# Altium PCB HC-NBIOT_Single_lamp_controller-V1.2.PcbDoc (part 2 of 2)
Units mm, origin at the board's own origin, x right, y up, seen from the top; angles counter-clockwise.
Board outline 119.9 x 57.5 mm, 2 copper layers (Top Layer, Bottom Layer); 151 components, 104 nets, 484 pads, 495 vias.
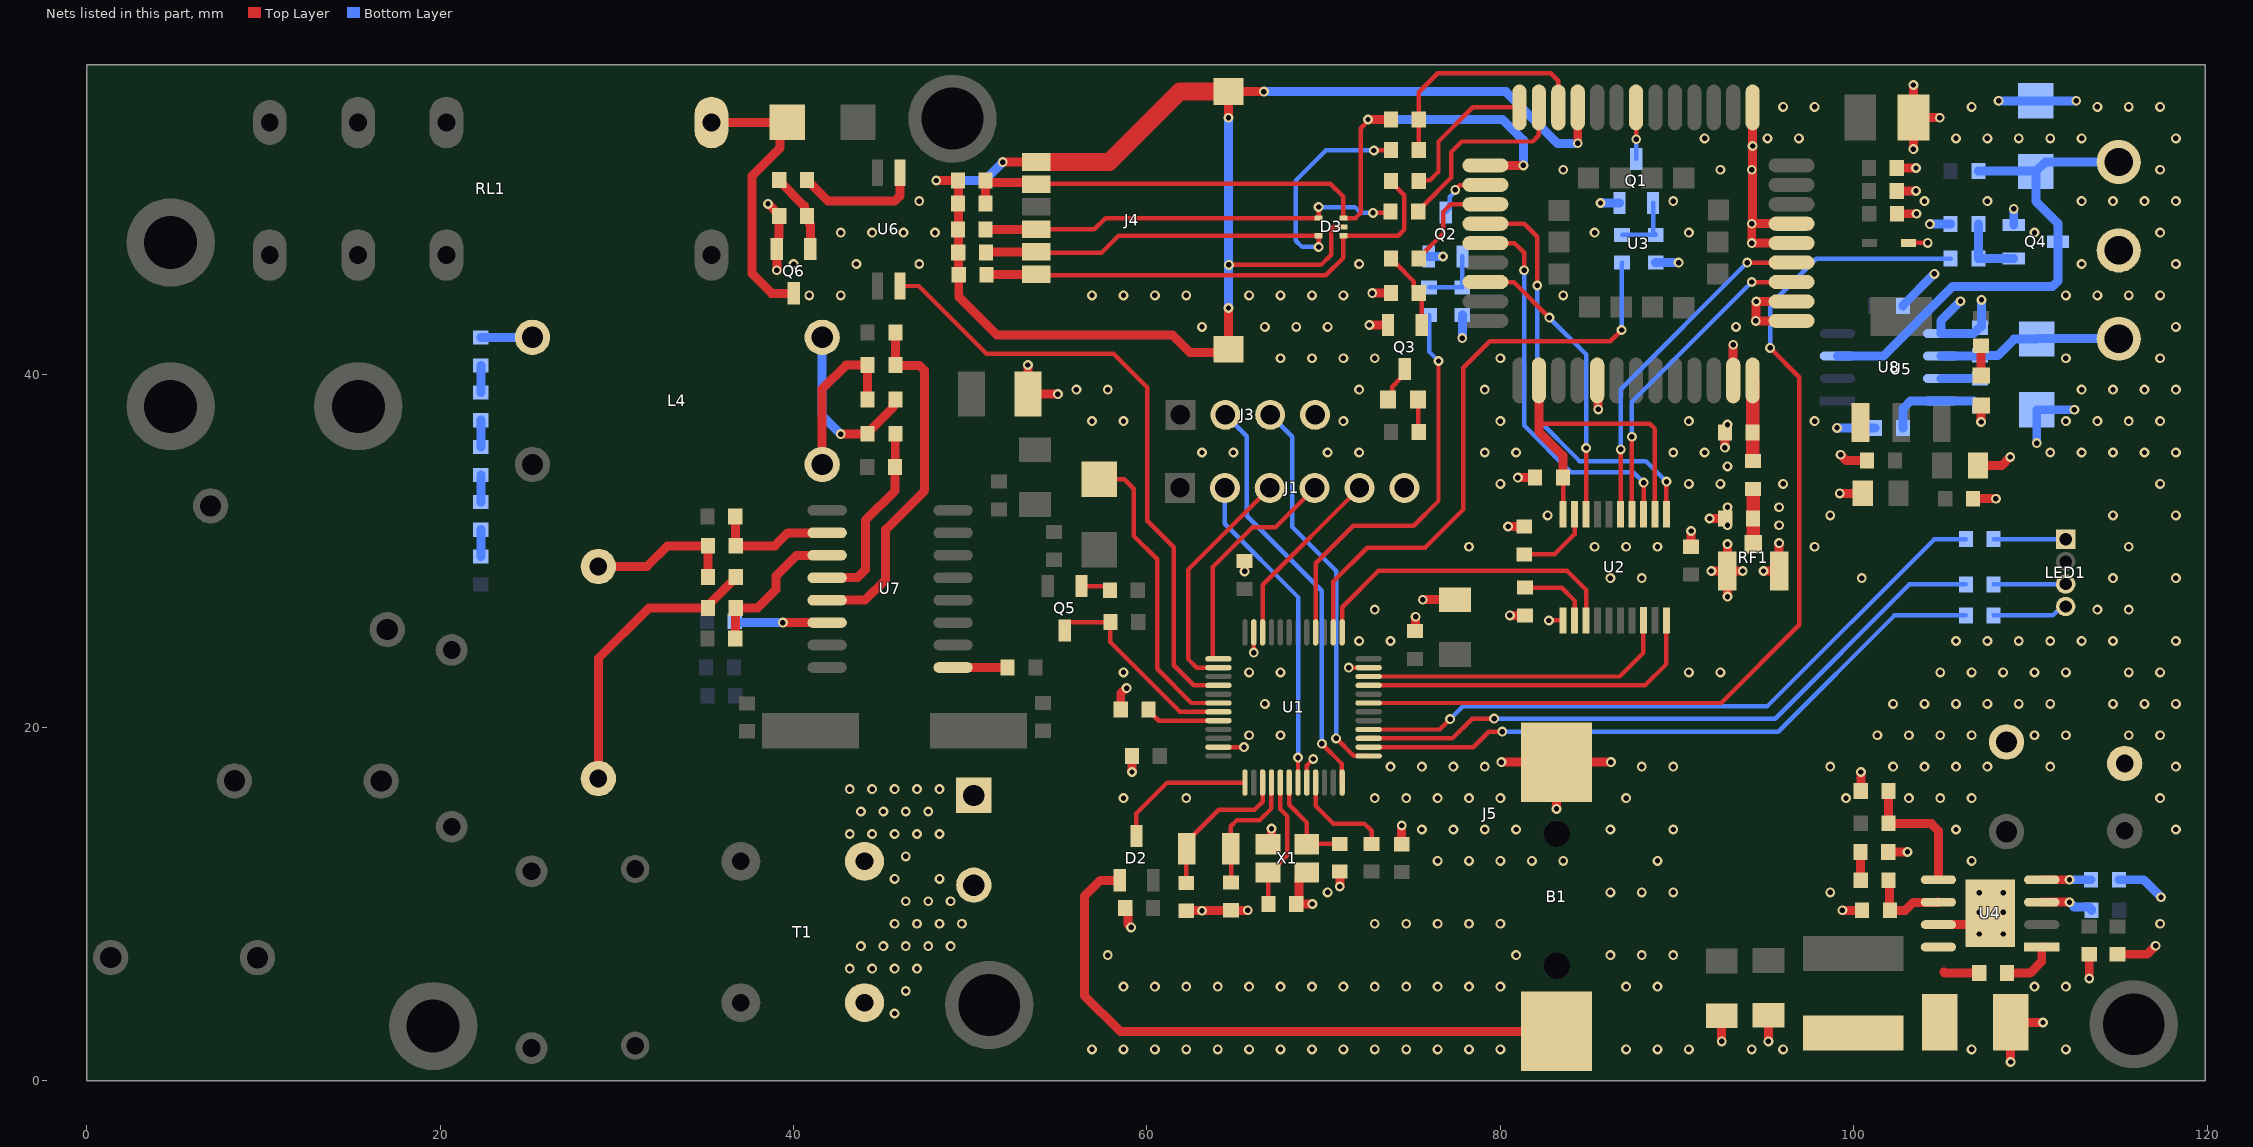
[diagram p2: the nets of this part, all layers, seen from the top]

## Via types
v1: diameter 0.559, hole 0.305, Top Layer to Bottom Layer, tented both sides, 493 vias
v2: diameter 1.8, hole 1.2, Top Layer to Bottom Layer, 2 vias

## Nets (pads, with @x,y where several pads share a name; then routed paths per layer and width w, separated by ;. In a path a pad name is that pad's centre, name@x,y a point inside that pad or via, vN(x,y) a via of type N, cw(c..) or ccw(c..) an arc to the next point about the centre after c; other vN are vias at no path point) (continued)
GND: B1.2 C1.2 C2.2 C3.2 C4.2 C5.2 C6.2 C7.1 C8.1 C9.2 C10.2 C11.2 C12.2 C13.1 C14.1 C15.1 C16.1 C17.1 C18.1 C28.2 C29.2 C30.1 C31.1 C32.1 C33.1 C34.1 C35.1 C36.2 C37.1 C38.1 C49.1 C50.1 C51.1 D1.2 D5.1 DW1.A DW3.A DW5.A J1.6 J3.4 J5.4 J11.1 Q1.2 Q2.2 Q3.2 Q4.2 Q6.2 R4.1 R5.1 R6.1 R22.1 R23.1 R24.1 R25.1 R27.1 R28.2 R34.1 R49.1 RF1.2 RF1.3 U1.8 U1.23 U1.35 U1.47 U2.11 U3.1 U3.27 U3.34 U3.36 U3.37 U3.40 U3.41 U4.7 U4.9 U5.1 U8.5 X1.2 X1.4 | length 137.7
  Top Layer w0.254: U1.47@64.051,18.883 v1(65.496,18.883) ; v1(66.051,24.232) U1.35@66.051,25.383 ; U1.8@69.051,16.883 69.059,16.892 69.059,17.853 v1(69.418,18.212) ; v1(71.425,23.383) U1.23@72.551,23.383 ; v1(82.753,26.053) U2.11@83.555,26.053 ; D1.2@103.103,47.422 v1(104.196,47.422)
  Top Layer w0.508: v1(38.557,49.632) 39.192,48.996 R49.1@39.192,48.946 39.192,47.734 39.151,47.693 39.151,47.167 Q6.2@39.055,47.071 v1(39.055,45.872) ; v1(53.264,40.513) R28.2@53.264,38.862 v1(54.966,38.862) ; R6.1@58.522,21.006 58.522,21.927 58.819,22.225 v1(58.852,22.225) ; C18.1@58.776,9.779 58.922,9.633 58.922,8.871 v1(59.106,8.687) ; v1(59.157,17.475) C15.1@59.157,18.39 ; v1(63.119,9.627) C11.2@62.23,9.627 62.243,9.639 64.757,9.639 C12.2@64.77,9.652 v1(65.71,9.652) ; v1(65.532,28.829) C14.1@65.532,29.413 ; X1.4@66.853,13.386 67.056,13.589 v1(67.056,14.275) ; X1.2@69.053,11.786 68.928,11.786 68.607,11.465 68.607,11.169 68.605,11.167 68.605,10.501 68.599,10.495 68.599,10.154 C7.1@68.453,10.008 v1(69.367,10.008) ; v1(70.917,10.998) C8.1@70.917,11.836 ; v1(72.593,42.779) Q3.2@73.65,42.779 ; v1(72.756,44.577) R24.1@73.812,44.577 ; C17.1@74.422,13.386 v1(74.422,14.453) ; C16.1@75.184,25.451 75.209,25.476 v1(75.209,26.264) ; v1(75.615,27.229) C13.1@77.445,27.229 ; v1(80.061,18.034) B1.2@83.185,18.034 ; v1(80.442,31.369) R4.1@81.356,31.369 ; v1(80.543,26.34) R5.1@81.407,26.34 ; v1(81.001,34.138) C2.2@81.966,34.138 ; v1(83.185,15.392) B1.2@83.185,18.034 ; U3.27@85.486,39.644 85.541,39.588 85.541,38.004 v1(85.547,37.998) ; v1(86.258,18.034) B1.2@83.185,18.034 ; C1.2@90.805,30.226 v1(90.805,31.115) ; v1(91.846,31.826) C10.2@92.735,31.826 ; v1(91.946,28.854) RF1.2@92.835,28.854 ; v1(92.532,2.235) C29.2@92.532,3.682 ; v1(92.71,35.839) C9.2@92.71,36.703 ; v1(92.862,27.407) RF1.2@92.862,28.881 ; v1(92.862,30.378) RF1.2@92.862,28.881 ; U3.34@93.186,39.644 v1(93.186,41.656) ; v1(93.724,28.854) RF1.2@92.835,28.854 ; U3.1@94.286,55.094 v1(94.286,52.908) 94.286,48.575 94.234,48.523 v1(94.234,48.51) ; v1(94.896,28.854) RF1.3@95.785,28.854 95.783,28.856 v1(95.783,30.429) ; v1(95.174,2.235) C28.2@95.174,3.708 ; U3.36@96.488,43.01 v1(94.463,43.01) 94.463,44.07 94.488,44.096 v1(94.488,44.11) U3.37@96.488,44.11 ; U3.40@96.488,47.41 v1(94.234,47.41) v1(94.234,48.51) ; U3.41@96.488,48.51 v1(94.234,48.51) ; v1(99.212,33.249) C34.1@100.508,33.249 ; v1(99.263,35.433) 99.593,35.103 C35.1@100.762,35.103 ; v1(99.365,9.652) C37.1@100.482,9.652 ; R27.1@100.406,16.408 v1(100.406,17.475) ; C38.1@101.956,12.954 v1(103.048,12.954) ; C4.2@102.437,50.368 v1(103.53,50.368) ; C5.2@102.437,51.664 v1(103.53,51.664) ; C3.2@102.462,49.073 v1(103.556,49.073) ; v1(103.381,52.73) C6.2@103.381,54.508 ; v1(103.381,56.363) C6.2@103.381,54.508 ; U4.7@104.796,8.839 107.086,8.839 U4.9@107.721,9.474 ; v1(104.877,54.508) C6.2@103.381,54.508 ; C33.1@106.756,32.944 v1(108.052,32.944) ; C32.1@107.036,34.823 108.382,34.823 v1(108.864,35.306) ; v1(107.213,37.287) D5.1@107.213,38.229 ; v1(108.883,1.067) DW1.A@108.883,3.302 v1(110.719,3.302) ; v1(113.335,5.791) C31.1@113.335,7.163 ; C30.1@114.935,7.163 116.611,7.163 v1(117.094,7.645) ; RF1.2@92.835,28.854 RF1.2@92.862,28.881
  Bottom Layer w0.508: Q2.2@75.961,46.655 v1(76.759,46.655) ; v1(77.851,42.037) R23.1@77.851,43.332 ; v1(85.674,49.682) Q1.2@86.746,49.682 ; R22.1@88.798,46.304 v1(90.094,46.304) ; v1(99.06,36.957) C49.1@101.219,36.957 ; C51.1@102.794,43.84 102.794,43.89 v1(104.572,45.668) ; v1(104.318,48.489) R34.1@105.486,48.489 ; v1(106.045,44.12) 104.935,43.009 104.935,42.294 U8.5@104.931,42.291 106.782,42.291 107.113,42.621 C50.1@107.163,42.621 107.239,42.697 v1(107.239,44.196) ; v1(108.204,55.467) DW3.A@110.312,55.467 v1(112.598,55.467) ; Q4.2@109.063,48.438 v1(109.063,49.352) ; v1(110.363,36.093) DW5.A@110.363,37.98 v1(112.497,37.98) ; R25.1@115.011,11.379 116.408,11.379 v1(117.399,10.389)
  other v1: 56.896,1.778 58.674,1.778 60.452,1.778 62.23,1.778 64.008,1.778 65.786,1.778 67.564,1.778 69.342,1.778 71.12,1.778 72.898,1.778 74.676,1.778 76.454,1.778 78.232,1.778 80.01,1.778 87.122,1.778 88.9,1.778 90.678,1.778 94.234,1.778 96.012,1.778 106.68,1.778 112.014,1.778 58.674,5.334 60.452,5.334 62.23,5.334 64.008,5.334 65.786,5.334 67.564,5.334 69.342,5.334 71.12,5.334 72.898,5.334 74.676,5.334 76.454,5.334 78.232,5.334 80.01,5.334 87.122,5.334 88.9,5.334 110.236,5.334 112.014,5.334 57.785,7.112 80.899,7.112 86.233,7.112 88.011,7.112 89.789,7.112 107.112,8.306 108.458,8.306 72.898,8.89 74.676,8.89 76.454,8.89 78.232,8.89 80.01,8.89 117.348,8.89 107.112,9.55 108.458,9.55 107.112,10.643 108.458,10.643 70.231,10.668 86.233,10.668 88.011,10.668 89.789,10.668 98.679,10.668 76.454,12.446 78.232,12.446 80.01,12.446 81.788,12.446 83.566,12.446 88.9,12.446 106.68,12.446 75.565,14.224 77.343,14.224 79.121,14.224 80.899,14.224 86.233,14.224 89.789,14.224 105.791,14.224 118.237,14.224 58.674,16.002 62.23,16.002 72.898,16.002 74.676,16.002 76.454,16.002 78.232,16.002 80.01,16.002 87.122,16.002 99.568,16.002 103.124,16.002 104.902,16.002 106.68,16.002 117.348,16.002 73.787,17.78 75.565,17.78 77.343,17.78 79.121,17.78 88.011,17.78 89.789,17.78 98.679,17.78 102.235,17.78 104.013,17.78 105.791,17.78 107.569,17.78 111.125,17.78 118.237,17.78 65.786,19.558 67.564,19.558 101.346,19.558 103.124,19.558 104.902,19.558 106.68,19.558 110.236,19.558 112.014,19.558 115.57,19.558 117.348,19.558 66.675,21.336 102.235,21.336 104.013,21.336 105.791,21.336 107.569,21.336 109.347,21.336 111.125,21.336 114.681,21.336 116.459,21.336 118.237,21.336 58.674,23.114 65.786,23.114 67.564,23.114 90.678,23.114 92.456,23.114 104.902,23.114 106.68,23.114 108.458,23.114 110.236,23.114 112.014,23.114 115.57,23.114 117.348,23.114 72.009,24.892 73.787,24.892 105.791,24.892 107.569,24.892 109.347,24.892 111.125,24.892 112.903,24.892 114.681,24.892 118.237,24.892 72.898,26.67 113.792,26.67 115.57,26.67 86.233,28.448 88.011,28.448 100.457,28.448 114.681,28.448 118.237,28.448 78.232,30.226 85.344,30.226 87.122,30.226 88.9,30.226 97.79,30.226 115.57,30.226 92.862,31.445 95.783,31.445 82.677,32.004 98.679,32.004 114.681,32.004 118.237,32.004 92.862,32.461 95.783,32.461 80.01,33.782 90.678,33.782 92.456,33.782 96.012,33.782 117.348,33.782 92.862,34.773 63.119,35.56 64.897,35.56 70.231,35.56 72.009,35.56 79.121,35.56 80.899,35.56 89.789,35.56 91.567,35.56 111.125,35.56 112.903,35.56 114.681,35.56 116.459,35.56 118.237,35.56 92.862,37.135 56.896,37.338 58.674,37.338 71.12,37.338 80.01,37.338 90.678,37.338 97.79,37.338 112.014,37.338 113.792,37.338 115.57,37.338 117.348,37.338 56.007,39.116 57.785,39.116 72.009,39.116 79.121,39.116 112.903,39.116 114.681,39.116 116.459,39.116 118.237,39.116 67.564,40.894 69.342,40.894 71.12,40.894 72.898,40.894 80.01,40.894 112.014,40.894 117.348,40.894 63.119,42.672 66.675,42.672 68.453,42.672 70.231,42.672 93.345,42.672 118.237,42.672 40.894,44.45 42.672,44.45 56.896,44.45 58.674,44.45 60.452,44.45 62.23,44.45 65.786,44.45 67.564,44.45 69.342,44.45 71.12,44.45 83.566,44.45 112.014,44.45 113.792,44.45 115.57,44.45 117.348,44.45 40.005,46.228 43.561,46.228 47.117,46.228 72.009,46.228 112.903,46.228 118.237,46.228 42.672,48.006 44.45,48.006 46.228,48.006 48.006,48.006 85.344,48.006 90.678,48.006 110.236,48.006 117.348,48.006 47.117,49.784 89.789,49.784 104.013,49.784 107.569,49.784 112.903,49.784 114.681,49.784 116.459,49.784 118.237,49.784 83.566,51.562 92.456,51.562 94.234,51.562 117.348,51.562 91.567,53.34 95.123,53.34 96.901,53.34 105.791,53.34 107.569,53.34 109.347,53.34 111.125,53.34 112.903,53.34 118.237,53.34 96.012,55.118 97.79,55.118 106.68,55.118 113.792,55.118 115.57,55.118 117.348,55.118
IBN: C40.2 R35.1 U7.3 | length 8.6
  Top Layer w0.508: C40.2@36.703,25.044 36.716,25.057 36.716,26.736 R35.1@36.728,26.748 37.95,26.748 39.014,27.813 39.014,28.575 40.183,29.743 U7.3@41.901,29.743
IBP: C39.2 R30.1 U7.2 | length 7.1
  Top Layer w0.508: C39.2@36.703,31.933 36.716,31.921 36.716,30.294 R30.1@36.728,30.282 38.943,30.282 39.675,31.013 U7.2@41.901,31.013
LED_B: R3.2 U1.14 | length 36.9
  Top Layer w0.254: U1.14@72.551,18.883 78.471,18.883 79.35,19.761 v1(80.112,19.761)
  Bottom Layer w0.254: v1(80.112,19.761) 95.733,19.761 102.311,26.34 R3.2@106.35,26.34
LED_DRV1: C50.2 DW5.K J12.1 U8.6 | length 10.5
  Bottom Layer w0.508: U8.6@104.931,41.021 104.935,41.025 107.141,41.025 C50.2@107.163,41.046 108.153,41.046 109.086,41.98 DW5.K@110.363,41.98 110.383,42 J12.1@115,42
LED_G: R2.2 U1.15 | length 37.4
  Top Layer w0.254: U1.15@72.551,19.383 77.295,19.383 78.41,20.498 v1(79.654,20.498)
  Bottom Layer w0.254: v1(79.654,20.498) 95.555,20.498 103.149,28.092 R2.2@106.35,28.092
LED_R: R1.2 U1.16 | length 38.3
  Top Layer w0.254: U1.16@72.551,19.883 76.576,19.883 v1(77.165,20.472)
  Bottom Layer w0.254: v1(77.165,20.472) 77.902,21.209 95.123,21.209 104.572,30.658 R1.2@106.35,30.658
NB-PWR: R16.1 U1.26 | length 33.6
  Top Layer w0.254: U1.26@70.551,25.383 70.551,28.26 72.466,30.175 75.743,30.175 77.902,32.334 77.902,40.361 79.4,41.859 86.233,41.859 v1(86.868,42.494)
  Bottom Layer w0.254: v1(86.868,42.494) 86.868,46.279 R16.1@86.893,46.304
NB-RI: U1.25 U2.13 | length 18.3
  Top Layer w0.254: U1.25@71.051,25.383 71.051,26.804 73.101,28.854 83.795,28.854 84.855,27.794 U2.13@84.855,26.053
NB-RST: R17.1 U1.28 | length 23.1
  Top Layer w0.254: U1.28@69.551,25.383 69.551,29.292 71.679,31.42 75.108,31.42 76.505,32.817 v1(76.505,40.742)
  Bottom Layer w0.254: R17.1@75.971,43.332 75.971,41.275 v1(76.505,40.742)
NetC9_1: C9.1 R7.2 U3.35 | length 4.6
  Top Layer w0.762: U3.35@94.286,39.644 C9.1@94.285,36.703 94.285,35.096 94.304,35.077 R7.2@94.31,35.077
NetC10_1: C10.1 R7.1 RF1.1 | length 3.1
  Top Layer w0.762: RF1.1@94.31,30.379 C10.1@94.31,31.826 R7.1@94.31,33.503
NetC23_2: C23.2 D3.4 J4.3 R8.2 | length 24
  Top Layer w0.254: J4.3@53.737,48.188 57.028,48.188 57.667,48.828 D3.4@69.723,48.828 v1(69.723,49.454) ; v1(72.796,49.124) 73.711,49.124 R8.2@73.787,49.2
  Top Layer w0.508: C23.2@50.876,48.184 50.881,48.188 53.737,48.188 J4.3@53.742,48.193
  Bottom Layer w0.254: v1(69.723,49.454) 71.774,49.454 72.104,49.124 v1(72.796,49.124)
NetC24_2: C24.2 D3.5 J4.6 R10.2 | length 30.9
  Top Layer w0.254: J4.6@53.725,46.906 53.767,46.863 57.429,46.863 58.395,47.828 D3.5@69.723,47.828 v1(69.723,47.193) ; v1(72.847,52.654) 73.787,52.654 R10.2@73.812,52.68
  Top Layer w0.508: C24.2@50.902,46.888 50.919,46.906 53.725,46.906 J4.6@53.742,46.923
  Bottom Layer w0.254: v1(69.723,47.193) 68.783,47.193 68.428,47.549 68.428,50.952 70.129,52.654 v1(72.847,52.654)
NetC25_2: C25.2 D3.1 J4.5 R11.2 | length 28.6
  Top Layer w0.254: J4.5@53.725,45.636 53.767,45.593 70.129,45.593 71.123,46.587 D3.1@71.123,47.828 74.219,47.828 74.574,48.184 74.574,50.115 73.812,50.877 R11.2@73.812,50.927
  Top Layer w0.508: C25.2@50.927,45.618 50.944,45.636 53.725,45.636 J4.5@53.742,45.653
NetC27_1: C27.1 U4.1 | length 3
  Top Layer w0.508: C27.1@108.687,6.096 109.982,6.096 110.646,6.76 U4.1@110.646,7.569
NetC27_2: C27.2 DW1.K L2.1 U4.8 | length 2
  Top Layer w0.508: 105.105,6.147 105.156,6.096 C27.2@107.112,6.096
NetC37_2: C37.2 R26.2 U4.6 | length 4.7
  Top Layer w0.508: R26.2@101.981,11.354 102.019,11.316 102.019,9.69 C37.2@102.057,9.652 102.921,9.652 103.374,10.105 104.792,10.105 U4.6@104.796,10.109
NetC38_2: C38.2 R26.1 | length 1.6
  Top Layer w0.508: C38.2@100.381,12.954 100.393,12.941 100.393,11.367 R26.1@100.406,11.354
NetC44_2: C44.2 U7.6 | length 5.3
  Top Layer w0.508: v1(39.395,25.933) U7.6@41.901,25.933
  Bottom Layer w0.508: C44.2@36.678,26.01 36.744,25.943 39.386,25.943 v1(39.395,25.933)
NetC49_2: C49.2 R50.2 U8.8 | length 5.8
  Bottom Layer w0.508: C49.2@102.794,36.957 102.794,38.049 103.226,38.481 U8.8@104.931,38.481 106.808,38.481 107.113,38.176 R50.2@107.163,38.176
NetD2_3: D2.3 U1.1 | length 8.2
  Top Layer w0.254: D2.3@59.411,13.848 59.411,15.138 61.155,16.883 U1.1@65.551,16.883
NetD4_1: D4.1 Q3.3 | length 2.1
  Top Layer w0.254: D4.1@73.65,38.557 73.885,38.792 73.885,39.289 74.377,39.781 74.6,40.004 Q3.3@74.6,40.279
NetD4_2: D4.2 R15.1 | length 1.8
  Top Layer w0.254: D4.2@75.35,38.557 75.35,36.766 R15.1@75.387,36.728
NetD5_2: D5.2 R20.2 | length 1.7
  Top Layer w0.508: D5.2@107.213,39.929 R20.2@107.213,41.605
NetDW4_A: DW4.A Q6.3 RL1.1 | length 16.5
  Top Layer w0.508: RL1.1@35.357,54.236 DW4.A@39.631,54.236 ; DW4.A@39.649,54.254 DW4.A@39.631,54.236 ; Q6.3@40.005,44.572 38.765,44.572 37.643,45.695 37.643,51.206 39.226,52.79 39.226,53.831 DW4.A@39.631,54.236
NetJ5_1: J5.1 T1.3
  other v1: 45.72,11.43 46.355,12.7 43.18,13.97 44.45,13.97 45.72,13.97 46.99,13.97 48.26,13.97 43.815,15.24 45.085,15.24 46.355,15.24 47.625,15.24 43.18,16.51 44.45,16.51 45.72,16.51 46.99,16.51 48.26,16.51
NetJ5_2: J5.2 T1.2
  other v1: 45.72,3.81 46.355,5.08 43.18,6.35 44.45,6.35 45.72,6.35 46.99,6.35 43.815,7.62 45.085,7.62 46.355,7.62 47.625,7.62 48.895,7.62 45.72,8.89 46.99,8.89 48.26,8.89 49.53,8.89 46.355,10.16 47.625,10.16 48.895,10.16 48.26,11.43
NetL1_1: L1.1 U1.9 | length 5.8
  Top Layer w0.254: U1.9@69.551,16.883 69.545,16.877 69.545,15.57 70.561,14.554 72.314,14.554 72.72,14.148 L1.1@72.72,13.411
NetL3_1: L3.1 R30.2 R32.2 | length 8.5
  Top Layer w0.508: L3.1@28.956,29.108 31.699,29.108 32.873,30.282 R30.2@35.154,30.282 R32.2@35.154,28.515
NetL3_2: L3.2 R32.1 R35.2 | length 16.6
  Top Layer w0.508: L3.2@28.956,17.109 28.956,23.901 31.826,26.772 R35.2@35.13,26.772 ; R35.2@35.154,26.748 R35.2@35.13,26.772 ; R32.1@36.728,28.515 36.728,28.465 35.3,27.036 35.3,26.941 R35.2@35.13,26.772
NetL4_2: L4.2 R42.1 | length 2.9
  Bottom Layer w0.508: R42.1@22.301,42.062 22.31,42.071 25.218,42.071 L4.2@25.227,42.08
NetL4_3: L4.3 R45.1 R47.2 | length 10
  Top Layer w0.508: v1(42.672,36.601) 42.682,36.611 44.184,36.611 R47.2@44.196,36.623 44.196,36.673 45.625,38.102 45.625,38.422 R45.1@45.771,38.568
  Bottom Layer w0.508: L4.3@41.626,42.08 41.626,37.648 v1(42.672,36.601)
NetL4_4: L4.4 R43.2 R45.2 | length 9.4
  Top Layer w0.508: L4.4@41.626,34.882 41.626,39.162 42.976,40.512 R43.2@44.196,40.512 R45.2@44.196,38.568
NETLED: R18.1 U3.16 | length 5.8
  Top Layer w0.254: R18.1@75.387,46.533 75.387,46.583 76.784,47.98 76.784,49.2 77.194,49.61 U3.16@79.161,49.61
NetLED1_1: LED1.1 R1.1 | length 4.1
  Bottom Layer w0.254: R1.1@107.925,30.658 111.997,30.658 LED1.1@112,30.655
NetLED1_3: LED1.3 R2.1 | length 4.1
  Bottom Layer w0.254: R2.1@107.925,28.092 107.947,28.115 LED1.3@112,28.115
NetLED1_4: LED1.4 R3.1 | length 4.3
  Bottom Layer w0.254: R3.1@107.925,26.34 111.266,26.34 111.771,26.845 LED1.4@112,26.845
NetQ1_1: Q1.1 R16.2 R22.2 | length 3.8
  Bottom Layer w0.254: R16.2@86.893,47.879 R22.2@88.798,47.879 88.646,48.031 Q1.1@88.646,49.682
NetQ2_1: Q2.1 R17.2 R23.2 | length 3.6
  Bottom Layer w0.254: R17.2@75.971,44.907 R23.2@77.851,44.907 77.861,44.917 Q2.1@77.861,46.655
NetQ3_1: Q3.1 R18.2 R24.2 | length 4.5
  Top Layer w0.254: R18.2@73.812,46.533 73.812,46.483 74.085,46.21 74.135,46.21 75.114,45.231 75.114,44.85 75.55,44.414 Q3.1@75.55,42.779
NetQ4_1: Q4.1 R33.1 R34.2 | length 4
  Bottom Layer w0.508: R34.2@107.061,48.489 R33.1@107.061,46.533 107.064,46.535 109.06,46.535 Q4.1@109.063,46.538
NetQ5_1: Q5.1 R36.2 | length 1.7
  Top Layer w0.254: Q5.1@56.297,27.996 57.678,27.996 R36.2@57.912,27.762
NetQ6_1: Q6.1 R48.2 R49.2 | length 4.6
  Top Layer w0.508: R48.2@39.192,50.978 39.192,50.928 40.621,49.499 40.621,49.092 R49.2@40.767,48.946 40.913,48.8 40.913,48.494 40.955,48.452 Q6.1@40.955,47.071
NetR4_2: R4.2 U2.9 | length 4.4
  Top Layer w0.254: R4.2@81.356,29.794 83.073,29.794 84.206,30.927 U2.9@84.206,32.055
NetR5_2: R5.2 U2.12 | length 4.2
  Top Layer w0.254: R5.2@81.407,27.915 83.471,27.915 84.205,27.181 U2.12@84.205,26.053
NetR6_2: R6.2 U1.44 | length 4.2
  Top Layer w0.254: R6.2@60.096,21.006 60.096,20.956 60.669,20.383 U1.44@64.051,20.383
NetR19_1: R19.1 U4.3 | length 3
  Top Layer w0.508: U4.3@110.646,10.109 v1(112.217,10.109)
  Bottom Layer w0.508: v1(112.217,10.109) 112.478,9.848 113.316,9.848 113.462,9.702 R19.1@113.462,9.652
NetR21_1: R21.1 R27.2 U4.5 | length 7.6
  Top Layer w0.508: R27.2@101.981,16.408 R21.1@101.981,14.58 102.006,14.554 104.394,14.554 104.796,14.152 U4.5@104.796,11.379
NetR25_2: R25.2 U4.4 | length 2.8
  Top Layer w0.508: U4.4@110.646,11.379 v1(112.217,11.379)
  Bottom Layer w0.508: v1(112.217,11.379) R25.2@113.436,11.379
NetR38_1: R38.1 R39.2 | length 1.5
  Bottom Layer w0.508: R38.1@22.301,29.667 R39.2@22.301,31.191
NetR39_1: R39.1 R40.2 | length 1.5
  Bottom Layer w0.508: R39.1@22.301,32.766 R40.2@22.301,34.29
NetR40_1: R40.1 R41.2 | length 1.5
  Bottom Layer w0.508: R40.1@22.301,35.865 R41.2@22.301,37.389
NetR41_1: R41.1 R42.2 | length 1.5
  Bottom Layer w0.508: R41.1@22.301,38.964 R42.2@22.301,40.488
NetR44_1: R44.1 U7.9 | length 3.1
  Top Layer w0.508: U7.9@49.031,23.393 R44.1@52.121,23.393
NetR50_1: R50.1 U8.7 | length 2.2
  Bottom Layer w0.508: U8.7@104.931,39.751 R50.1@107.163,39.751
nRST: J1.2 U1.7 | length 18.4
  Top Layer w0.254: U1.7@68.551,16.883 68.553,16.885 68.553,18.286 v1(68.555,18.288)
  Bottom Layer w0.254: J1.2@64.414,33.553 64.414,31.521 68.555,27.381 v1(68.555,18.288)
PWM: R33.2 U1.19 | length 56.3
  Top Layer w0.254: U1.19@72.551,21.383 92.503,21.383 96.926,25.806 96.926,39.827 v1(95.275,41.478)
  Bottom Layer w0.254: v1(95.275,41.478) 95.275,43.917 97.892,46.533 R33.2@105.486,46.533
PWM1_OUT: DW3.K J10.1 Q4.3 R31.1 U8.3 | length 29.1
  Bottom Layer w0.508: U8.3@99.081,41.021 101.676,41.021 105.613,44.958 111.264,44.958 111.562,45.256 Q4.3@111.562,47.488 111.562,48.534 110.312,49.784 DW3.K@110.312,51.467 ; R31.1@107.061,51.486 110.293,51.486 DW3.K@110.312,51.467 ; J10.1@115,52 110.845,52 DW3.K@110.312,51.467
PWRKEY: Q1.3 U3.7 | length 2.9
  Top Layer w0.254: U3.7@87.686,55.094 87.691,55.088 87.691,53.294 v1(87.696,53.289)
  Bottom Layer w0.254: Q1.3@87.696,52.182 v1(87.696,53.289)
RCC_OSC32_IN: C11.1 U1.3 X2.2 | length 8.7
  Top Layer w0.254: C11.1@62.23,11.201 62.23,13.112 X2.2@62.25,13.132 62.25,13.532 64.06,15.342 66.091,15.342 66.551,15.801 U1.3@66.551,16.883
RCC_OSC32_OUT: C12.1 U1.4 X2.1 | length 7.4
  Top Layer w0.254: C12.1@64.77,11.227 64.77,13.112 X2.1@64.75,13.132 64.75,14.407 65.1,14.757 66.396,14.757 67.051,15.412 U1.4@67.051,16.883
RCC_OSC_IN: C7.2 U1.5 X1.1 | length 7.6
  Top Layer w0.254: C7.2@66.878,10.008 66.878,11.76 X1.1@66.853,11.786 66.978,11.786 67.945,12.752 67.945,14.986 67.551,15.38 U1.5@67.551,16.883
RCC_OSC_OUT: C8.2 U1.6 X1.3 | length 5.8
  Top Layer w0.254: U1.6@68.051,16.883 68.051,15.617 69.053,14.615 X1.3@69.053,13.386 69.078,13.411 C8.2@70.917,13.411
REL: R48.1 U6.3 | length 7.2
  Top Layer w0.508: R48.1@40.767,50.978 40.767,50.928 40.913,50.782 40.963,50.782 41.961,49.784 45.727,49.784 46.025,50.082 U6.3@46.025,51.384
REL_EN: U1.40 U6.2 | length 35.7
  Top Layer w0.254: U6.2@46.025,44.984 47.091,44.984 50.927,41.148 58.115,41.148 60.02,39.243 60.02,31.699 61.519,30.201 61.519,23.52 62.656,22.383 U1.40@64.051,22.383
RESET: Q2.3 U3.15 | length 3.3
  Top Layer w0.254: v1(77.452,50.422) 77.452,50.436 77.695,50.679 79.13,50.679 U3.15@79.161,50.71
  Bottom Layer w0.254: Q2.3@76.911,49.154 77.134,49.377 77.134,50.022 77.452,50.34 v1(77.452,50.422)
RI: U2.8 U3.20 | length 16.5
  Top Layer w0.254: U3.20@79.161,45.21 80.762,45.21 v1(82.779,43.193) ; U2.8@84.856,32.055 84.912,32.111 84.861,32.162 v1(84.861,35.814)
  Bottom Layer w0.254: v1(82.779,43.193) 84.861,41.11 v1(84.861,35.814)
RXD: U2.1 U3.17 | length 24.2
  Top Layer w0.254: U3.17@79.161,48.51 81.361,48.51 82.093,47.777 v1(82.093,45.009) ; U2.1@89.405,32.055 89.408,32.058 v1(89.408,33.909)
  Bottom Layer w0.254: v1(82.093,45.009) 82.093,37.465 84.48,35.077 88.24,35.077 v1(89.408,33.909)
RXD_DBG: U2.4 U3.38 | length 18.2
  Top Layer w0.254: v1(87.452,36.449) 87.452,32.058 U2.4@87.455,32.055 ; v1(94.234,45.21) U3.38@96.488,45.21
  Bottom Layer w0.254: v1(87.452,36.449) 87.452,38.428 v1(94.234,45.21)
SIM_CLK: R11.1 U3.13 | length 8.4
  Top Layer w0.254: R11.1@75.387,50.927 75.435,50.975 76.019,50.975 76.505,51.46 76.505,53.162 78.436,55.094 U3.13@81.086,55.094
SIM_DATA: R9.2 R10.1 U3.11 | length 13.3
  Top Layer w0.254: R10.1@75.387,52.68 R9.2@75.387,54.407 75.387,55.956 76.454,57.023 82.855,57.023 83.286,56.592 U3.11@83.286,55.094
SIM_GND: C19.1 C22.1 C23.1 C24.1 C25.1 D3.2 J4.2 J4.7 J4.8 U3.10 | length 88.9
  Top Layer w0.254: v1(64.643,46.177) 69.85,46.177 70.434,46.761 70.434,48.18 70.583,48.328 D3.2@71.123,48.328
  Top Layer w0.508: v1(48.082,50.952) C19.1@49.301,50.952 49.327,50.927 C24.1@49.327,46.888 49.327,45.644 C25.1@49.352,45.618 49.352,44.374 51.511,42.215 61.443,42.215 62.433,41.224 64.454,41.224 J4.7@64.622,41.392 v1(64.622,43.739) ; v1(51.841,51.994) 51.846,51.998 53.737,51.998 J4.2@53.742,52.003 ; v1(64.622,54.508) J4.8@64.622,55.992 64.627,55.987 66.619,55.987 v1(66.624,55.982) ; v1(84.386,53.061) U3.10@84.386,55.094
  Top Layer w1.016: J4.2@53.742,52.003 57.871,52.003 61.859,55.992 J4.8@64.622,55.992
  Bottom Layer w0.508: v1(48.082,50.952) 50.8,50.952 v1(51.841,51.994) ; v1(64.622,43.739) v1(64.622,54.508) ; v1(66.624,55.982) 80.315,55.982 83.236,53.061 v1(84.386,53.061)
SIM_RST: R8.1 U3.12 | length 11.1
  Top Layer w0.254: R8.1@75.362,49.2 75.362,49.25 75.635,49.523 77.216,51.104 77.216,52.553 77.826,53.162 81.839,53.162 82.186,53.509 U3.12@82.186,55.094
SIM_VDD: C19.2 C22.2 D3.3 J4.1 R9.1 U3.14 | length 43.9
  Top Layer w0.254: J4.1@53.632,50.843 53.701,50.775 70.383,50.775 71.123,50.035 D3.3@71.123,48.828 71.809,48.828 72.099,49.118 72.099,53.907 72.517,54.324 v1(72.517,54.407)
  Top Layer w0.508: C22.2@50.876,49.657 C19.2@50.876,50.952 50.986,50.843 J4.1@53.632,50.843 ; J4.1@53.701,50.775 J4.1@53.742,50.733 ; v1(72.517,54.407) R9.1@73.812,54.407 ; U3.14@79.161,51.81 v1(81.305,51.81)
  Bottom Layer w0.508: v1(72.517,54.407) 80.137,54.407 81.305,53.238 v1(81.305,51.81)
SYS_JTCK-SWCLK: J1.4 U1.37 | length 13.1
  Top Layer w0.254: U1.37@64.051,23.883 63.75,23.883 63.729,23.904 63.729,29.083 65.964,31.318 67.259,31.318 J1.4@69.494,33.553
SYS_JTDI: J1.3 U1.38 | length 13.5
  Top Layer w0.254: U1.38@64.051,23.383 62.825,23.383 62.332,23.876 62.332,28.931 J1.3@66.954,33.553
SYS_JTMS-SWDIO: J1.5 U1.34 | length 10.4
  Top Layer w0.254: U1.34@66.551,25.383 66.551,28.07 J1.5@72.034,33.553
TXD: U2.3 U3.18 | length 22.1
  Top Layer w0.254: U3.18@79.161,47.41 80.806,47.41 81.352,46.863 v1(81.352,45.872) ; U2.3@88.105,32.055 88.109,32.058 88.109,33.854 v1(88.113,33.858)
  Bottom Layer w0.254: v1(81.352,45.872) 81.352,37.088 83.998,34.442 87.528,34.442 v1(88.113,33.858)
TXD_DBG: U2.5 U3.39 | length 19.7
  Top Layer w0.254: U2.5@86.806,32.055 86.817,32.066 v1(86.817,35.738) ; v1(93.98,46.31) U3.39@96.488,46.31
  Bottom Layer w0.254: v1(86.817,35.738) 86.817,39.147 v1(93.98,46.31)
USART1_RX: Q5.3 R37.2 U1.43 | length 11.8
  Top Layer w0.254: Q5.3@55.347,25.497 55.347,25.736 55.57,25.959 R37.2@57.937,25.959 57.937,24.816 61.87,20.883 U1.43@64.051,20.883
USART1_TX: DW2.K U1.42 | length 17.2
  Top Layer w0.254: DW2.K@57.302,34.048 58.713,34.048 59.258,33.503 59.258,30.836 60.579,29.515 60.579,23.317 62.513,21.383 U1.42@64.051,21.383
USART2_RX: J3.3 U1.13 | length 22.1
  Top Layer w0.254: v1(70.714,19.38) 71.709,18.384 72.549,18.384 U1.13@72.551,18.383
  Bottom Layer w0.254: J3.3@66.98,37.694 68.224,36.449 68.224,31.344 70.714,28.854 v1(70.714,19.38)
USART2_TX: J3.2 U1.12 | length 23.5
  Top Layer w0.254: v1(69.901,19.075) 71.042,17.934 71.042,16.892 U1.12@71.051,16.883
  Bottom Layer w0.254: J3.2@64.44,37.694 65.659,36.474 65.659,31.979 69.901,27.737 v1(69.901,19.075)
USART3_RX: U1.22 U2.18 | length 17.9
  Top Layer w0.254: U1.22@72.551,22.883 86.764,22.883 88.105,24.224 U2.18@88.105,26.058
USART3_TX: U1.21 U2.20 | length 19.8
  Top Layer w0.254: U1.21@72.551,22.383 88.194,22.383 89.405,23.594 U2.20@89.405,26.053
VBAT: B1.1 D2.1 | length 35.5
  Top Layer w0.508: D2.1@58.461,11.349 57.374,11.349 56.464,10.439 56.464,4.826 58.496,2.794 B1.1@83.185,2.794
VDD_EXT_1V8: C2.1 U2.2 U2.10 U3.24 | length 19.7
  Top Layer w0.254: 82.186,37.186 88.468,37.186 88.755,36.899 U2.2@88.755,32.055 ; C2.1@83.541,34.138 83.556,34.123 U2.10@83.556,32.055
  Top Layer w0.508: U3.24@82.186,39.644 82.186,37.186 82.186,36.737 83.541,35.382 C2.1@83.541,34.138
VN: C43.2 R43.1 U7.5 | length 20.1
  Top Layer w0.508: U7.5@41.901,27.203 44.044,27.203 45.212,28.372 45.212,31.191 47.422,33.401 47.422,40.19 47.124,40.488 45.795,40.488 R43.1@45.771,40.512 C43.2@45.771,42.342
VP: C47.2 R47.1 U7.4 | length 10.8
  Top Layer w0.508: U7.4@41.901,28.473 43.612,28.473 44.069,28.931 44.069,31.725 45.745,33.401 C47.2@45.745,34.747 45.758,34.76 45.758,36.611 R47.1@45.771,36.623
pads on no net: B1. J4.4 M1.1 M2.1 M3.1 RL1.2 RL1.7 U1.2 U1.10 U1.11 U1.17 U1.18 U1.20 U1.27 U1.29 U1.30 U1.31 U1.32 U1.33 U1.39 U1.41 U2.6 U2.7 U2.14 U2.15 U2.16 U2.17 U3.2 U3.3 U3.4 U3.5 U3.6 U3.8 U3.9 U3.19 U3.21 U3.22 U3.23 U3.25 U3.26 U3.28 U3.29 U3.30 U3.31 U3.32 U3.33 U3.44 U3.45 U3.46 U3.47 U3.48 U3.49 U3.50 U3.51 U3.52 U3.53 U3.54 U3.55 U3.56 U3.57 U3.58 U7.1 U7.16 U8.1 U8.2
copper on no net:
  other v2: 50.175,13.631 108.65,16.638

## Polygon pours and split planes (outlines as drawn)
GND on Top Layer "NONET_L01_P-001" (solid, remove dead copper, pour order 16): 32.233,57.506 32.233,43.866 49.124,43.866 52.146,40.843 52.146,37.694 52.451,37.389 55.22,37.389 56.109,36.5 56.109,0 119.888,0 119.888,57.48
AGND on Top Layer "NONET_L01_P-001" (solid, remove dead copper, pour order 13): 21.895,43.485 20.726,42.316 20.726,27.915 21.742,26.899 22.708,26.899 23.622,25.984 23.622,13.919 23.8,13.741 34.087,13.741 34.29,13.945 34.29,17.297 34.798,17.805 55.22,17.805 55.626,18.212 55.626,36.474 55.093,37.008 51.333,37.008 50.952,37.389 50.952,42.088 49.555,43.485
+3.3VD on Top Layer "NONET_L01_P-001" (solid, remove dead copper, pour order 12): 99.212,51.714 98.73,51.232 95.174,51.232 94.92,50.978 94.92,49.378 95.225,49.073 98.704,49.073 99.212,48.565 99.212,42.545 101.549,40.208 101.549,31.166 101.752,30.963 103.505,30.963 103.657,31.115 103.657,40.869 104.623,41.834 104.953,42.164 104.953,44.323 104.445,44.831 101.549,47.727 101.549,56.21 101.371,56.388 99.365,56.388 99.212,56.236
+5VD on Top Layer "NONET_L01_P-001" (solid, remove dead copper, pour order 11): 102.819,8.611 102.845,8.611 103.251,8.204 103.251,6.121 102.794,5.664 91.592,5.664 91.11,6.147 91.11,15.621 95.479,19.99 104.115,28.626 104.115,38.354 104.394,38.633 105.639,38.633 105.893,38.379 105.893,26.492 97.638,18.237 97.638,8.839 97.866,8.611
NetC27_2 on Top Layer "NONET_L01_P-001" (solid, remove dead copper, pour order 10): 105.842,8.179 105.943,8.077 105.943,0.991 105.867,0.914 96.672,0.914 96.596,0.991 96.596,4.674 97.028,5.105 102.972,5.105 103.556,5.69 103.556,7.95 103.784,8.179
+12VD on Top Layer "NONET_L01_P-001" (solid, remove dead copper, pour order 9): 107.34,15.469 106.959,15.088 106.959,12.941 107.378,12.522 112.446,12.522 112.7,12.268 112.7,9.652 112.42,9.373 109.677,9.373 109.499,9.195 109.499,8.407 109.652,8.255 116.027,8.255 116.484,8.712 116.484,15.062 116.078,15.469
NetJ5_2 on Top Layer "NONET_L01_P-001" (solid, remove dead copper, pour order 7): 42.545,6.883 41.935,6.274 41.935,3.505 42.545,2.896 46.634,2.896 47.142,3.404 47.142,5.182 51.486,9.525 51.486,11.608 50.749,12.344 48.006,12.344
NetJ5_1 on Top Layer "NONET_L01_P-001" (solid, remove dead copper, pour order 6): 51.384,17.221 42.164,17.221 41.91,16.967 41.91,10.719 42.469,10.16 44.907,10.16 45.822,11.074 49.657,14.91 51.257,14.91 51.613,15.265 51.613,16.993
AC220V_L on Top Layer "NONET_L01_P-001" (solid, remove dead copper, pour order 0): 12.675,57.15 17.932,57.15 18.593,56.49 18.593,13.792 19.456,12.929 34.112,12.929 35.255,14.072 38.76,14.072 39.675,13.157 39.675,7.188 38.684,6.198 13.03,6.198 12.014,7.214 12.014,56.49
GND on Bottom Layer "NONET_L01_P-001" (solid, remove dead copper, pour order 17): 32.233,57.506 32.233,43.866 49.124,43.866 52.146,40.843 52.146,37.694 52.451,37.389 55.22,37.389 56.109,36.5 56.109,0 119.888,0 119.888,57.48
AGND on Bottom Layer "NONET_L01_P-001" (solid, remove dead copper, pour order 15): 21.895,43.485 20.726,42.316 20.726,27.915 21.742,26.899 22.708,26.899 23.622,25.984 23.622,13.919 23.8,13.741 34.087,13.741 34.29,13.945 34.29,17.297 34.798,17.805 55.22,17.805 55.626,18.212 55.626,36.474 55.093,37.008 51.333,37.008 50.952,37.389 50.952,42.088 49.555,43.485
AC220V_PE on Bottom Layer "NONET_L01_P-001" (solid, remove dead copper, pour order 3): 19.253,26.111 21.946,26.111 22.352,25.705 22.352,19.507 21.285,18.44 12.04,18.44 9.322,15.723 0.787,15.723 0.279,16.231 0.279,42.393 1.194,43.307 9.169,43.307 10.084,42.393 10.084,24.613 10.897,23.8 18.339,23.8 18.771,24.232 18.771,25.629
NetJ5_2 on Bottom Layer "NONET_L01_P-001" (solid, remove dead copper, pour order 5): 42.545,6.883 41.935,6.274 41.935,3.505 42.545,2.896 46.634,2.896 47.142,3.404 47.142,5.182 51.486,9.525 51.486,11.608 50.749,12.344 48.006,12.344
NetJ5_1 on Bottom Layer "NONET_L01_P-001" (solid, remove dead copper, pour order 4): 51.384,17.221 42.164,17.221 41.91,16.967 41.91,10.719 42.469,10.16 44.907,10.16 45.822,11.074 49.657,14.91 51.257,14.91 51.613,15.265 51.613,16.993
AC220V_L_OUT on Bottom Layer "NONET_L01_P-001" (solid, remove dead copper, pour order 2): 12.929,57.15 13.665,56.413 13.665,44.755 12.903,43.993 1.168,43.993 0.457,44.704 0.457,56.388 1.219,57.15
AC220V_N on Bottom Layer "NONET_L01_P-001" (solid, remove dead copper, pour order 1): 19.533,15.57 18.796,14.834 0.864,14.834 0.254,14.199 0.254,0.991 0.813,0.432 38.887,0.432 39.675,1.219 39.675,9.601 38.913,10.363 23.698,10.363 22.581,11.481 22.581,14.808 21.819,15.57

## Other copper
Top Layer:
  pour cut-out: 93.497,41.3 95.047,41.3 95.072,41.275 95.072,29.54 93.497,29.54
Bottom Layer:
  pour cut-out: 93.497,41.3 95.047,41.3 95.072,41.275 95.072,29.54 93.497,29.54

## Silkscreen, mask and mechanical layers (free items; w line width, h text height)
Top Overlay:
  drawing of 1197 lines, arcs and shapes, not listed
  text "PWM" at 112.846,53.685 h2.03
  text "L/OUT" at 0.711,50.343 h3
  text "GND" at 113.064,48.602 h2.03
  text "0-10V" at 112.801,43.609 h2.03
  text "PE" at 3.124,41.173 h3
  text "L/IN" at 13.233,41.173 h3
  text "RX2" at 66.142,39.243 h1
  text "+3.3V" at 60.604,39.218 h1
  text "TX2" at 63.576,39.218 h1
  text "GND" at 68.665,39.218 h1
  text "+3.3V" at 60.484,35.092 h1
  text "GND" at 73.685,35.027 h1
  text "RGB" at 110.668,34.163 h2.03
  text "指示灯" at 110.465,32.106 h2.03
  text "恒创新能源科技有限公司" at 93.574,20.523 h2
  text "N" at 18.771,6.452 h3
  text "NBIOT" at 55.22,4.826 h3
  text "单灯控制器-V1.2" at 54.94,1.905 h3
Mechanical 1:
  the board outline again, w0.5

## Text inside footprints (layer, text, board x,y; h text height)
C36: Top Overlay "+" at 114.941,12.153 h1.27
L3: Top Overlay "*" at 30.947,29.426 h2.03 r329
L4: Top Overlay "*" at 39.381,34.466 h2.03 r45.14; Top Overlay "*" at 27.951,34.592 h2.03 r45
U4: Top Overlay "1" at 111.081,6.724 h0.8 r90
U8: Bottom Overlay "1" at 98.349,37.77 h0.8 r180